# Altium PCB PCBenDIM.PcbDoc (part 3 of 3)
Units mil, origin at the board's own origin, x right, y up, seen from the top; angles counter-clockwise.
Board outline 3937.01 x 3149.61 mil, 2 copper layers (Top Layer, Bottom Layer); 105 components, 104 nets, 450 pads, 157 vias.
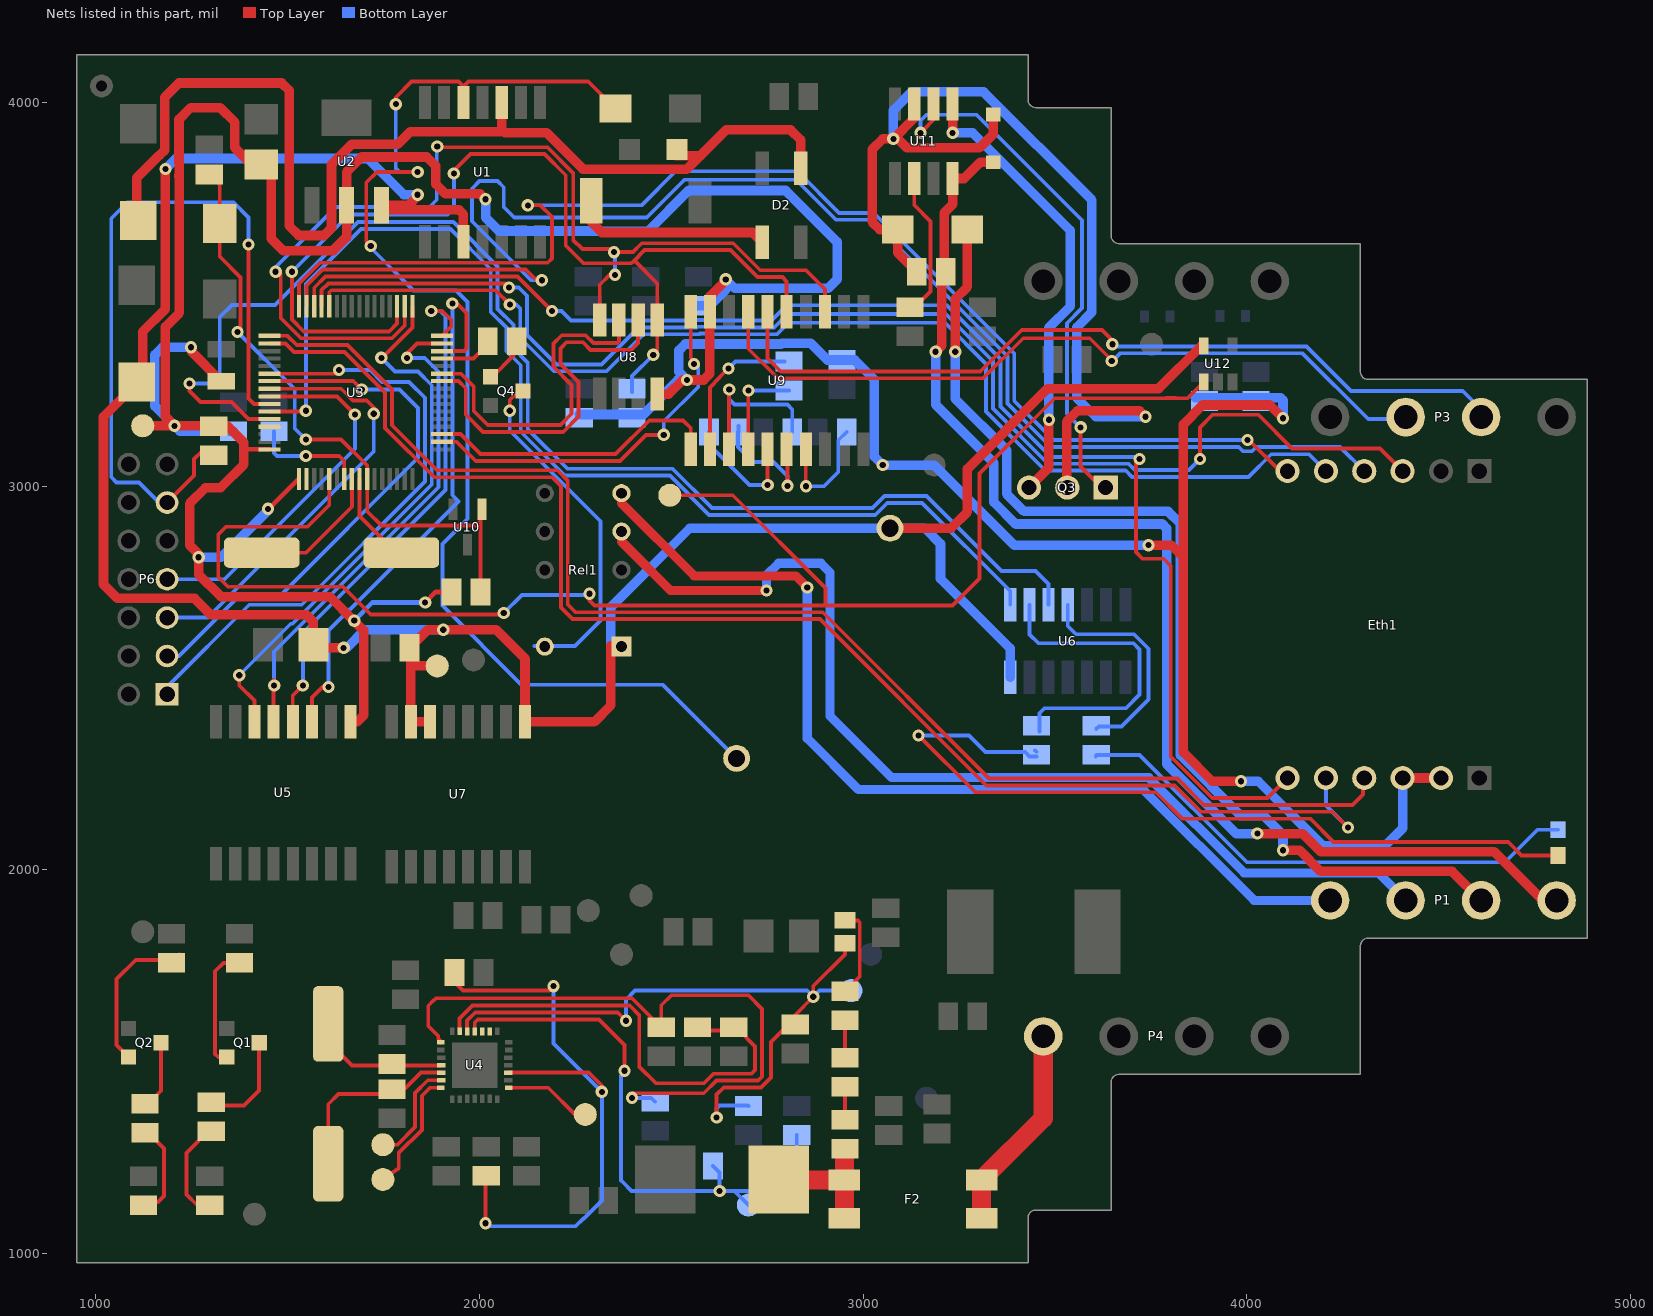
[diagram p2: the nets of this part, all layers, seen from the top]

## Via types
v1: diameter 32, hole 16, Top Layer to Bottom Layer, 157 vias

## Nets (pads, with @x,y where several pads share a name; then routed paths per layer and width w, separated by ;. In a path a pad name is that pad's centre, name@x,y a point inside that pad or via, vN(x,y) a via of type N, cw(c..) or ccw(c..) an arc to the next point about the centre after c; other vN are vias at no path point) (continued)
MICRO_RTS_1: P6.11 R1.2 U3.58 | length 1991.7
  Top Layer w10: P6.11@1185.43,2957.48 1255.91,3027.95 1255.91,3070.87 1273.62,3088.58 R1.2@1326.77,3088.58 ; v1(1397.64,3629.92) 1397.64,3228.5 1412.05,3214.09 U3.58@1452.17,3214.09
  Bottom Layer w10: P6.11@1185.43,2957.48 1164.57,2957.48 1112.05,3010 1054,3010 1040,3024 1040,3697.48 1082.68,3740.16 1358.27,3740.16 1397.64,3700.79 v1(1397.64,3629.92)
MICRO_TCK_1: P6.7 U3.57 | length 962.3
  Top Layer w10: U3.57@1452.17,3234.09 1628.11,3234.09 v1(1675,3187.2)
  Bottom Layer w10: P6.7@1185.43,2757.48 1334.88,2757.48 1675,3097.6 v1(1675,3187.2)
MICRO_TD0_1: P6.1 U3.54 | length 1576
  Top Layer w10: U3.54@1452.17,3293.09 1631.68,3293.09 1633.86,3295.28 v1(1633.86,3303.15)
  Bottom Layer w10: P6.1@1185.43,2457.48 1185.43,2476.77 1399.66,2691 1536.43,2691 1857.64,3012.21 1857.64,3230.68 1816.19,3272.13 1746,3272.13 1714.98,3303.15 v1(1633.86,3303.15)
MICRO_TDI_1: P6.3 U3.55 | length 1414.5
  Top Layer w10: U3.55@1452.17,3274.09 1670.79,3274.09 v1(1692.91,3251.97)
  Bottom Layer w10: P6.3@1185.43,2557.48 1216.62,2557.48 1368.01,2708.87 1474.32,2708.87 1839.76,3074.32 1839.76,3203.68 1791.48,3251.97 v1(1692.91,3251.97)
MICRO_TMS_1: P6.5 U3.56 | length 1139.6
  Top Layer w10: U3.56@1452.17,3254.09 1639.61,3254.09 1670.61,3223.09 1706.04,3223.09 1728.35,3200.79 1716.54,3188.98 v1(1724.41,3188.98)
  Bottom Layer w10: P6.5@1185.43,2657.48 1291.34,2657.48 1724.41,3090.55 v1(1724.41,3188.98)
NetC4_2: C4.2 U3.7 | length 294.4
  Top Layer w10: v1(1547.24,3078.74) 1547.56,3078.43 1634.17,3078.43 1647.17,3065.43 U3.7@1647.17,3019.09
  Bottom Layer w10: C4.2@1464.57,3143.31 1464.57,3086.61 1472.44,3078.74 v1(1547.24,3078.74)
NetC6_1: C6.1 C7.2 U4.15 | length 1720.9
  Top Layer w10: U4.15@1898.82,1550 1898.82,1553.94 1892.32,1560.43 1892.32,1566.52 1866.14,1592.7 1866.14,1645.67 1879.39,1658.92 1880.45,1658.92 1886.89,1665.35 2397.64,1665.35 C6.1@2473.62,1589.37 2473.62,1646.85 2500,1673.23 2700.79,1673.23 2736.38,1637.64 2736.38,1460.79 2726.22,1450.63 2617.64,1450.63 2584.6,1417.59 2397.91,1417.59 2389.76,1409.45 2393.7,1405.51 v1(2397.63,1405.51)
  Bottom Layer w10: v1(2397.63,1405.51) 2447.64,1405.51 C7.2@2457.87,1395.28
NetC8_1: C8.1 C9.2 U4.3 | length 1645.9
  Top Layer w10: C9.2@1934.65,1732.28 1934.65,1707.09 1956.69,1685.04 2181.1,1685.04 v1(2192.91,1696.85) ; v1(2015.75,1078.74) C8.1@2015.75,1202.36 ; U4.3@2075,1471.26 2284.64,1471.26 2318.9,1437.01 v1(2318.9,1421.26)
  Bottom Layer w10: v1(2015.75,1078.74) 2023.62,1070.87 2250.31,1070.87 2270.8,1091.36 2272.46,1091.36 2318.9,1137.8 v1(2318.9,1421.26) 2192.91,1547.24 2192.91,1692.91 2196.85,1696.85 v1(2192.91,1696.85)
NetC13_2: C13.2 U4.18 Y2.1 | length 376.8
  Top Layer w10: Y2.1@1615.83,1598.23 Y2.1@1605.51,1598.23 1605.51,1551.97 1667.32,1490.16 1899.01,1490.16 U4.18@1899.8,1490.95
NetC14_2: C14.2 U4.19 Y2.2 | length 483.3
  Top Layer w10: Y2.2@1605.51,1234.05 1605.51,1388.98 1631.89,1415.36 1791.34,1415.36 1847.25,1471.26 U4.19@1899.8,1471.26
NetC16_1: C16.1 C17.2 U4.13 | length 1239.1
  Top Layer w10: U4.13@1948.03,1579.53 1948.03,1612.76 1981.26,1645.98 2391.73,1645.98 2416.14,1621.57 2416.14,1487.24 2459.82,1443.56 2585.3,1443.56 2610.24,1468.5 2708.66,1468.5 2718.5,1478.35 2718.5,1539.76 2677.17,1581.1 2646.85,1581.1 C17.2@2552.36,1581.1
NetC21_2: C21.2 D6.2 D7.2 Q3.2 U11.7 | length 2779.4
  Top Layer w25: U11.7@3133.27,3996.21 3133.27,3960.04 v1(3078.74,3905.51) ; C21.2@3147.64,3551.18 3090.55,3608.27 D6.2@3090.55,3669.29 3043.31,3669.29 3023.62,3688.98 3023.62,3877.95 3051.18,3905.51 v1(3078.74,3905.51) ; D7.2@3339.37,3969.09 3339.37,3918.11 3303.15,3881.89 3114.17,3881.89 3090.55,3905.51 v1(3078.74,3905.51) ; Q3.2@3532.28,2996.46 3530.56,2998.18 3530.56,3168.61 3558.8,3196.85 3720.47,3196.85 v1(3736.22,3181.1)
  Bottom Layer w25: v1(3078.74,3905.51) 3078.74,3980.1 3126.57,4027.93 3314.14,4027.93 3596.34,3745.73 3596.34,3564.56 3595.96,3564.19 3595.96,3504.71 3596.34,3504.34 3596.34,3453.7 3556.87,3414.24 3556.87,3230.53 3606.3,3181.1 v1(3736.22,3181.1)
NetC28_1: C28.1 U9.2 | length 384.4
  Top Layer w10: U9.2@2600.59,3096.46 2600.59,3257.71 2625.96,3283.08 2625.96,3283.96 v1(2649,3307)
  Bottom Layer w10: v1(2649,3307) 2667.2,3325.2 C28.1@2795.28,3325.2
NetC28_2: C28.2 U9.4 | length 259.7
  Top Layer w10: U9.4@2700.59,3096.46 2700.59,3249.4 v1(2701,3249.81)
  Bottom Layer w10: v1(2701,3249.81) 2806.88,3249.81 C28.2@2807.09,3249.61
NetC30_1: C30.1 U9.5 | length 339
  Top Layer w10: v1@2750.59,2998.41 2751,2998.82 v1(2751,3003) 2751,3096.05 U9.5@2750.59,3096.46
  Bottom Layer w10: C30.1@2598.03,3141.73 2598.03,3108.97 2704,3003 v1(2751,3003) 2751,3002.15 v1@2743.85,2995
NetC30_2: C30.2 U9.6 | length 337.4
  Top Layer w10: U9.6@2800.59,3096.46 2802.56,3094.48 v1(2802.56,3001)
  Bottom Layer w10: C30.2@2673.62,3141.73 2673.62,3101.97 2712.59,3063 2766,3063 2802.56,3026.44 v1(2802.56,3001) ; C30.2@2675.2,3141.73 C30.2@2675.2,3157.48
NetC31_1: C31.1 U9.3 | length 414.8
  Top Layer w10: U9.3@2650.59,3096.46 2650.59,3251.59 v1(2651,3252)
  Bottom Layer w10: v1(2651,3252) 2651,3226.95 2664.84,3213.11 2802.64,3213.11 2815.36,3200.39 C31.1@2815.36,3141.73
NetC32_1: C32.1 U9.7 | length 309.6
  Top Layer w10: U9.7@2850.59,3096.46 2850.59,3000.41 v1(2851,3000)
  Bottom Layer w10: v1(2851,3000) 2897.64,3000 2935.04,3037.4 2935.04,3119.68 C32.1@2957.09,3141.73
NetD2_1: D2.1 F1.2 | length 499.6
  Top Layer w25: F1.2@2291.34,3720.47 2291.34,3688.98 2318.9,3661.42 2711.81,3661.42 D2.1@2737.4,3635.83
NetD4_1: D4.1 R15.1 | length 2131.8
  Top Layer w10: v1(3144.32,2350.39) 3292.58,2202.13 3762.87,2202.13 3831.62,2133.38 4165.52,2133.38 4226.54,2072.36 4681.58,2072.36 4716.54,2037.4 D4.1@4811.02,2037.4
  Bottom Layer w10: v1(3144.32,2350.39) 3275.59,2350.39 3318.9,2307.09 3422.44,2307.09 3433.66,2295.87 R15.1@3452.76,2295.87 ; R15.1@3448.42,2311.02 R15.1@3451.57,2307.87
NetD5_1: D5.1 R18.1 | length 1360.7
  Bottom Layer w10: R18.1@3606.3,2295.28 R18.1@3610.63,2299.61 ; R18.1@3607.48,2299.61 R18.1@3610.63,2299.61 ; D5.1@4811.02,2104.33 4757.87,2104.33 4673.23,2019.68 4000.71,2019.68 3720.79,2299.61 R18.1@3610.63,2299.61
NetD10_1: D10.1 R27.1 | length 272.2
  Top Layer w10: D10.1@1296.85,1125.59 1264.17,1125.59 1236.22,1153.54 1236.22,1262.2 R27.1@1300.79,1326.77
NetD11_1: D11.1 R28.1 | length 253.8
  Top Layer w10: D11.1@1123.62,1133.86 1161.42,1133.86 1177.17,1149.61 1177.17,1273.23 R28.1@1127.56,1322.83
NetEth1_3: Eth1.3 U3.45 | length 3480.5
  Top Layer w10: U3.45@1588.17,3469.09 1588.17,3511.08 1605.93,3528.84 2065.98,3528.84 v1(2076.82,3518) ; v1(3877.95,3070.87) 3877.95,3153.54 3910.76,3186.35 4030.18,3186.35 4118.11,3098.43 4347.24,3098.43 Eth1.3@4406.3,3039.37
  Bottom Layer w10: v1(2076.82,3518) 2102.39,3518 2123.86,3496.53 2123.86,3394.62 2200.89,3317.58 2317.58,3317.58 2414.13,3414.13 2565.72,3414.13 2567.3,3415.71 2603.23,3415.71 2604.81,3414.13 2768.31,3414.13 2803.18,3449 3215.32,3449 3338.58,3325.74 3338.58,3202.23 3482.11,3058.7 3691.8,3058.7 3708.51,3041.99 3849.08,3041.99 v1(3877.95,3070.87)
NetEth1_4: Eth1.4 U3.47 | length 3866.7
  Top Layer w10: U3.47@1549.17,3469.09 1549.17,3522.64 1591.12,3564.59 2057.3,3564.59 2057.46,3564.75 2096.18,3564.75 2096.34,3564.59 2120.45,3564.59 2148.24,3536.8 v1(2162.43,3536.8)
  Bottom Layer w10: v1(2162.43,3536.8) 2134.15,3536.8 1980.32,3690.63 1980.32,3775.59 2000,3795.28 2047.24,3795.28 2062.99,3779.53 2062.99,3728.35 2090.55,3700.79 2435.79,3700.79 2534,3799 2825.33,3799 2929.6,3694.72 3020.16,3694.72 3376.14,3338.74 3376.14,3215.23 3489.01,3102.36 3979.17,3102.36 3990.17,3091.36 4014.09,3091.36 4025.09,3102.36 4243.31,3102.36 Eth1.4@4306.3,3039.37
NetEth1_5: Eth1.5 U3.44 | length 3104.2
  Top Layer w10: U3.44@1608.17,3469.09 1608.17,3505.8 1613.33,3510.97 2042.03,3510.97 v1(2079,3474)
  Bottom Layer w10: v1(2079,3474) 2094.98,3474 2105.98,3463 2105.98,3387.22 2193.49,3299.71 2331.2,3299.71 2427.76,3396.26 2573.13,3396.26 2574.7,3397.83 2595.83,3397.83 2597.4,3396.26 2775.71,3396.26 2805.45,3426 3213.05,3426 3320.71,3318.34 3320.71,3194.83 3474.71,3040.83 3684.4,3040.83 3701.11,3024.12 4004.43,3024.12 4063.86,3083.54 4162.12,3083.54 Eth1.5@4206.3,3039.37
NetEth1_6: Eth1.6 U3.48 | length 3342.7
  Top Layer w10: U3.48@1529.68,3469.61 U3.48@1529.17,3469.09 1529.17,3527.91 1583.72,3582.46 2049.89,3582.46 2050.05,3582.62 2103.59,3582.62 2177.75,3582.6 2188.98,3593.83 2188.98,3702.38 2159.08,3732.28 v1(2125.98,3732.28) ; v1@4003.94,3122.05 4086.61,3039.37 Eth1.6@4106.3,3039.37
  Bottom Layer w10: v1(2125.98,3732.28) 2422.28,3732.28 2511,3821 2828.61,3821 2937.01,3712.6 3027.56,3712.6 3394.02,3346.14 3394.02,3222.63 3496.41,3120.24 v1(4002.13,3120.24)
NetEth1_10: Eth1.10 U3.49 | length 3632.2
  Top Layer w10: U3.49@1476.38,3392.09 1499.33,3392.09 1523.47,3367.95 1655.77,3367.95 1771.65,3252.07 1771.65,3159.14 1889.29,3041.5 2202.6,3041.5 2230.16,3013.94 2230.16,2691.1 2249.84,2671.42 2894.68,2671.42 3328.23,2237.87 3819.13,2237.87 3887.87,2169.13 4275.43,2169.13 4303.15,2196.85 4303.15,2236.22 Eth1.10@4306.3,2239.37
NetEth1_11: Eth1.11 U3.50 | length 3727.1
  Top Layer w10: U3.50@1452.17,3372.09 1494.05,3372.09 1516.06,3350.08 1648.37,3350.08 1753.78,3244.66 1753.78,3151.73 1881.89,3023.62 2188.98,3023.62 2212.28,3000.31 2212.28,2683.7 2242.44,2653.54 2887.28,2653.54 3320.82,2220 3811.72,2220 3880.47,2151.25 4222.76,2151.25 v1(4263.78,2110.24)
  Bottom Layer w10: Eth1.11@4206.3,2239.37 4206.3,2167.72 v1(4263.78,2110.24)
NetEth1_12: Eth1.12 U3.46 | length 3721.7
  Top Layer w10: U3.46@1569.17,3469.09 1569.17,3517.36 1598.52,3546.72 2064.7,3546.72 2064.86,3546.87 2088.78,3546.87 2088.94,3546.72 2098.95,3546.72 v1(2188.98,3456.69) ; v1@3711.28,3060.37 3711.28,2828.09 3728.35,2811.02 3783.46,2811.02 3802,2792.49 3802,2295 3910,2187 4053.93,2187 Eth1.12@4106.3,2239.37
  Bottom Layer w10: v1(2188.98,3456.69) 2214.08,3456.69 2238.76,3432.01 2558.32,3432.01 2559.89,3433.58 2610.63,3433.58 2612.21,3432.01 2760.91,3432.01 2800.9,3472 3217.6,3472 3358.27,3331.33 3358.27,3207.82 3489.52,3076.57 3714.76,3076.57 v1(3720.47,3070.87)
NetF2_1: F2.1 P4.4 | length 540.8
  Top Layer w50: F2.1@3308.66,1091.73 F2.1@3308.66,1191.73 3469.49,1352.56 P4.4@3469.49,1565.94
NetF2_2: F2.2 R4.1 V1.1 | length 354.3
  Top Layer w10: V1.1@2779.53,1192.91 V1.1@2780.71,1191.73
  Top Layer w50: V1.1@2780.71,1191.73 F2.2@2951.18,1191.73 ; F2.2@2951.18,1091.73 F2.2@2951.18,1191.73 ; R4.1@2952.76,1273.23 2951.18,1271.65 F2.2@2951.18,1191.73
NetP1_3: P1.3 Rel1.4 | length 2758.7
  Top Layer w23.62: Rel1.4@2370.08,2881.89 2370.08,2855.91 2497.64,2728.34 v1(2748.03,2728.34)
  Bottom Layer w23.62: v1(2748.03,2728.34) 2748.03,2767.71 2779.53,2799.21 2889.76,2799.21 2913.39,2775.59 2913.39,2401.57 3074.53,2240.43 3745.05,2240.43 3993.36,1992.13 4342.52,1992.13 P1.3@4414.37,1920.28
NetP1_4: P1.4 Rel1.5 | length 2533
  Top Layer w23.62: Rel1.5@2370.08,2981.89 2370.08,2955.91 2559.77,2766.22 2824.34,2766.22 v1(2854.33,2736.22)
  Bottom Layer w23.62: v1(2854.33,2736.22) 2854.33,2342.52 2987.91,2208.94 3730.7,2208.94 4019.36,1920.28 P1.4@4217.52,1920.28
NetQ1_1: Q1.1 R27.2 | length 265
  Top Layer w10: R27.2@1300.79,1385.83 1385.83,1385.83 1425.2,1425.2 1425.2,1548.62 Q1.1@1425.79,1549.21
NetQ1_2: Q1.2 R25.1 | length 322.1
  Top Layer w10: Q1.2@1341.14,1511.81 1318.9,1511.81 1310.55,1520.16 1310.55,1735.75 1332.28,1757.48 R25.1@1374.02,1757.48
NetQ2_1: Q2.1 R28.2 | length 184.9
  Top Layer w10: R28.2@1127.56,1381.89 1169.88,1424.21 Q2.1@1169.88,1549.21
NetQ2_2: Q2.2 R26.1 | length 412.1
  Top Layer w10: Q2.2@1085.24,1511.81 1053.74,1543.31 1053.74,1715.16 1103.94,1765.35 R26.1@1203.94,1765.35 ; R26.1@1208.66,1765.35 R26.1@1203.94,1765.35 ; R26.1@1218.11,1779.53 R26.1@1203.94,1765.35
NetQ3_1: Q3.1 U11.6 | length 1443.4
  Top Layer w10: v1(3149.61,3921.26) 3188.98,3960.63 3183.27,3960.63 U11.6@3183.27,3996.21 ; v1@3566.75,3153.54 3566.75,3051.36 3621.65,2996.46 Q3.1@3632.28,2996.46 ; v1(3566.93,3153.54) v1@3566.93,3165.01
  Bottom Layer w10: v1(3149.61,3921.26) 3149.61,3952.76 3165.35,3968.5 3295.9,3968.5 3570.96,3693.44 3570.96,3575.07 3570.59,3574.7 3570.59,3494.2 3570.96,3493.82 3570.96,3464.21 3531.5,3424.75 3531.5,3188.98 v1(3566.93,3153.54)
NetQ3_3: Q3.3 U11.5 | length 1202
  Top Layer w25: v1(3233.27,3921.26) U11.5@3233.27,3996.21 ; Q3.3@3432.28,2996.46 3484.25,3048.42 v1(3484.25,3173.23)
  Bottom Layer w25: v1(3233.27,3921.26) 3285.67,3921.26 3539.86,3667.07 3539.86,3469 3484.25,3413.39 v1(3484.25,3173.23)
NetQ4_1: Q4.1 Rel1.12 | length 895.4
  Top Layer w10: v1(2078.74,3196.85) 2078.74,3224.41 Q4.1@2094.49,3240.16
  Bottom Layer w10: v1(2078.74,3196.85) 2078.74,3145.67 2315.69,2908.72 2315.69,2650.33 2248.82,2583.46 2142.52,2583.46
NetQ4_3: Q4.3 R22.2 | length 120.3
  Top Layer w10: Q4.3@2028.54,3285.43 2033.46,3285.43 2088.58,3340.55 R22.2@2088.58,3377.95
NetR3_2: R3.2 U3.35 U8.1 U9.15 | length 2686.5
  Top Layer w10: v1(1510.79,3559.06) 1510.79,3434.76 1541.85,3403.7 1764.64,3403.7 1785.17,3424.23 U3.35@1785.17,3469.09 ; v1(1933.07,3814.96) 1933.07,3822.83 1976.06,3865.83 2169.61,3865.83 2224.72,3810.71 2224.72,3627.61 2270.97,3581.36 2395.01,3581.36 2396.32,3582.68 ; 2397.64,3582.68 2400.94,3585.98 ; v1(2452.76,3342.52) 2463.39,3353.15 U8.1@2463.39,3433.07 2463.39,3528.74 2406.14,3585.98 2400.94,3585.98 ; U9.15@2800.59,3454.72 2800.59,3534.06 2789.53,3545.12 2724.42,3545.12 2654.05,3615.49 2430.45,3615.49 2400.94,3585.98
  Bottom Layer w10: v1(1510.79,3559.06) 1660.4,3708.66 1917.32,3708.66 1933.07,3724.41 v1(1933.07,3814.96) ; R3.2@2397.64,3246.06 2397.64,3287.4 v1(2452.76,3342.52)
NetR4_2: R4.2 R9.1 | length 85.8
  Top Layer w10: R4.2@2952.76,1348.82 R9.1@2952.76,1434.65
NetR9_2: R9.2 R14.1 | length 97.6
  Top Layer w10: R9.2@2952.76,1510.24 R14.1@2952.76,1607.87
NetR14_2: R14.2 R23.1 | length 236.1
  Top Layer w10: R14.2@2952.76,1683.46 2991.22,1721.93 2991.22,1863.11 2986.22,1868.11 R23.1@2952.76,1868.11
NetR15_2: R15.2 U6.2 | length 826.8
  Bottom Layer w10: U6.2@3433.46,2690.94 3433.46,2613.78 3456.69,2590.55 3704.72,2590.55 3720.47,2574.8 3720.47,2456.69 3685.04,2421.26 3472.44,2421.26 3459.45,2408.27 R15.2@3459.45,2361.02
NetR18_2: R18.2 U6.4 | length 591
  Bottom Layer w10: U6.4@3533.46,2690.94 3533.46,2635.83 3555.12,2614.17 3706.38,2614.17 3744.09,2576.46 3744.09,2444.49 3673.62,2374.02 3614.57,2374.02 R18.2@3607.48,2366.93
NetR21_1: R21.1 U11.2 | length 363.8
  Top Layer w10: U11.2@3133.27,3802.21 3133.27,3732.87 3175.87,3690.28 3175.87,3507.87 3149.61,3481.61 R21.1@3149.61,3466.93
NetR22_1: R22.1 U3.29 | length 145.9
  Top Layer w10: U3.29@1902.17,3333.09 1984.67,3333.09 R22.1@2029.53,3377.95
NetU3_2: U3.2
NetU3_8: U3.8 Y1.2 | length 333.5
  Top Layer w10: Y1.2@1455.71,2826.77 1547.24,2826.77 1667.17,2946.69 U3.8@1667.17,3019.09
NetU3_9: U3.9 Y1.1 | length 268.8
  Top Layer w10: U3.9@1687.17,3019.09 1687.17,2922.76 1783.15,2826.77 Y1.1@1796.26,2826.77 Y1.1@1819.88,2826.77
NetU3_18: U3.18 U9.20 | length 1007.5
  Top Layer w10: U3.18@1902.17,3116.09 1940,3116.09 1989.97,3066.13 2365.97,3066.13 2433.7,3133.86 v1(2480.32,3133.86) ; U9.20@2550.59,3454.72 2550.59,3334.41 2566.1,3318.9 v1(2559.06,3318.9)
  Bottom Layer w10: v1(2480.32,3133.86) 2480.32,3169.32 2570,3259 2570,3315.82 2566.92,3318.9 v1(2559.06,3318.9)
NetU3_19: U3.19 U9.1 | length 769.7
  Top Layer w10: U3.19@1902.17,3136.09 1950.66,3136.09 2002.75,3084 2354.71,3084 2442.44,3171.73 2530.27,3171.73 2550.59,3151.41 U9.1@2550.59,3096.46
NetU3_26: U3.26 U8.2 | length 949.5
  Top Layer w10: U3.26@1902.17,3274.09 1945.36,3274.09 1964,3255.45 1964,3187 2009.27,3141.73 2218.09,3141.73 2258.03,3181.67 2258.03,3271.65 2210.79,3318.9 2210.79,3359.04 2227.08,3375.33 2269.4,3375.33 2289.65,3355.08 2395.46,3355.08 2413.39,3373 U8.2@2413.39,3433.07
NetU3_27: U3.27 U8.3 | length 890.7
  Top Layer w10: U3.27@1902.17,3293.09 1951.64,3293.09 1985,3259.73 1985,3196 2021.39,3159.61 2210.69,3159.61 2240.16,3189.08 2240.16,3264.25 2192.91,3311.49 2192.91,3372.36 2214.25,3393.7 2276.31,3393.7 2297.06,3372.95 2358.34,3372.95 2363.39,3378 U8.3@2363.39,3433.07
NetU3_30: U3.30 U5.3 | length 1471.6
  Top Layer w10: U5.3@1563.19,2385.79 1563.19,2449.02 1590.55,2476.38 v1(1606.3,2476.38) ; U3.30@1902.17,3352.09 1959.09,3352.09 1966,3359 1966,3451.31 1940.93,3476.38 v1(1929.13,3476.38)
  Bottom Layer w10: v1(1606.3,2476.38) 1606.3,2623.51 1661.27,2678.48 1662.73,2678.48 1944.88,2960.63 1929.13,2976.37 v1(1929.13,3476.38)
NetU3_31: U3.31 U5.5 | length 1330.6
  Top Layer w10: U5.5@1463.19,2385.79 1463.19,2494.69 1464.57,2493.31 v1(1464.57,2480.32) ; v1(1811.02,3334.65) 1811.02,3346.46 1836.66,3372.09 U3.31@1902.17,3372.09
  Bottom Layer w10: v1(1464.57,2480.32) 1464.57,2568.58 1893.39,2997.4 1893.39,3298.61 1857.35,3334.65 v1(1811.02,3334.65)
NetU3_32: U3.32 U5.4 | length 1378.4
  Top Layer w10: U5.4@1513.19,2385.79 1513.19,2454.13 v1(1539.37,2480.31) ; v1(1874.01,3456.69) 1902.68,3456.69 1926.3,3433.07 1926.3,3416.22 U3.32@1902.17,3392.09
  Bottom Layer w10: v1(1539.37,2480.31) 1539.37,2618.11 1911.26,2990 1911.26,3443.66 1898.23,3456.69 v1(1874.01,3456.69)
NetU3_33: U3.33 U5.6 | length 1434.4
  Top Layer w10: v1(1373.67,2507.18) 1373.67,2480.66 1413.19,2441.14 U5.6@1413.19,2385.79 ; v1(1744.09,3334.65) 1746.14,3334.65 1825.17,3413.67 U3.33@1825.17,3469.09
  Bottom Layer w10: v1(1373.67,2507.18) 1507.81,2641.33 1512.04,2641.33 1875.51,3004.81 1875.51,3263.28 1839.58,3299.21 1779.53,3299.21 v1(1744.09,3334.65)
NetU3_34: U3.34 U8.4 U9.13 | length 2734.1
  Top Layer w10: v1(1468.5,3559.05) 1468.5,3566.93 1481.92,3553.52 1481.92,3438.36 1534.45,3385.83 1772.04,3385.83 1805.17,3418.95 U3.34@1805.17,3469.09 ; v1(1889.76,3885.83) 1891.89,3883.7 2177.01,3883.7 2244.09,3816.62 2244.09,3642.08 2268,3618.17 v1@2343.17,3618.17 ; U8.4@2313.39,3433.07 2313.39,3525.28 2339.1,3551 v1(2353,3551) ; v1(2350.39,3610.24) 2399.92,3610.24 2423.05,3633.36 2661.45,3633.36 2731.82,3562.99 2851.01,3562.99 2900.59,3513.41 U9.13@2900.59,3454.72
  Bottom Layer w10: v1(1468.5,3559.05) 1468.5,3570.86 1625.98,3728.35 1870.08,3728.35 1888.45,3746.72 1888.45,3884.51 v1(1889.76,3885.83) ; v1(2350.39,3610.24) 2353,3610.24 v1(2353,3551)
NetU3_59: U3.59 U6.1 | length 2987
  Top Layer w10: U3.59@1452.17,3195.09 1541.11,3195.09 1547.24,3188.96 v1(1547.24,3196.85)
  Bottom Layer w10: v1(1547.24,3196.85) 1547.24,3527.45 1690.62,3670.84 1924.28,3670.84 2029.37,3565.74 2029.37,3454.46 2070.24,3413.6 2070.24,3352.65 2107.61,3315.27 2107.61,3142.07 2222.13,3027.56 2496.06,3027.56 2598.43,2925.2 3031.5,2925.2 3062.99,2956.69 3153.54,2956.69 3383.46,2726.77 U6.1@3383.46,2690.94
NetU3_60: U3.60 U6.3 | length 3430.4
  Top Layer w10: v1(1244.09,3267.72) 1244.09,3248.03 1272.49,3219.64 1353.09,3219.64 1397.64,3175.09 U3.60@1452.17,3175.09
  Bottom Layer w10: v1(1244.09,3267.72) 1295.28,3267.72 1322.83,3295.28 1322.83,3440.94 1354.33,3472.44 1466.95,3472.44 1683.22,3688.71 1931.68,3688.71 2047.24,3573.15 2047.24,3461.87 2088.11,3421 2088.11,3360.06 2125.49,3322.68 2125.49,3149.48 2229.53,3045.43 2503.47,3045.43 2605.83,2943.07 3024.09,2943.07 3055.59,2974.57 3165.43,2974.57 3361,2779 3449.35,2779 3483.46,2744.88 U6.3@3483.46,2690.94
NetU3_61: U3.61
NetU4_9: U4.9
NetU4_10: U4.10
OUTLM1: D1.2 L1.2 U1.12 | length 3293.1
  Top Layer w10: v1(1716.54,3625.98) 1704.72,3637.8 1704.72,3791.34 1732.28,3818.9 v1(1838.58,3818.9) ; v1(1781.79,3996.06) 1781.79,4014.08 1822.83,4055.12 1944.88,4055.12 1957.87,4042.13 1970.94,4055.2 2283.39,4055.2 D1.2@2354.33,3984.25 ; U1.12@1957.87,4000.59 U1.12@1957.87,4032.76
  Bottom Layer w10: v1(1716.54,3625.98) 1716.54,3621.73 1827.96,3510.31 1938.51,3510.31 1968.5,3480.32 1968.5,2915.21 1903.07,2849.77 1903.07,2689.04 2109.82,2482.28 2478.35,2482.28 L1.2@2670.08,2290.55 ; v1(1781.79,3996.06) 1781.79,3828.23 1791.13,3818.9 v1(1838.58,3818.9) v1@1842.52,3818.9
REF: C37.2 C38.2 R19.1 U3.10 U10.1 | length 1634.6
  Top Layer w10: C38.2@1295.28,3812.6 1322.83,3785.04 C37.2@1322.83,3685.04 1322.83,3598.43 1377.05,3544.21 1377.05,3410.5 v1(1368.76,3402.22) ; v1(1547.24,3122.04) 1639.12,3122.04 1707.17,3054 U3.10@1707.17,3019.09 1707.17,2934.57 1744.09,2897.64 1992.13,2897.64 2002.36,2907.87 ; R19.1@2002.36,2724.41 2002.36,2907.87 ; U10.1@2005.91,2933.07 2002.36,2929.53 2002.36,2907.87
  Bottom Layer w10: v1(1368.76,3402.22) 1369.43,3402.22 1518.37,3253.28 1518.37,3150.91 v1(1547.24,3122.04)
REVP_ADE: pad.000@1748.03,1283.46 U4.20 | length 273.6
  Top Layer w10: pad.000@1748.03,1283.46 1785.92,1283.46 1831.77,1329.31 1831.77,1418.39 1864.96,1451.58 U4.20@1899.8,1451.58
"RS232 RECIEVE DATA": P3.3 U9.16 | length 2191.4
  Top Layer w10: U9.16@2750.59,3454.72 2750.59,3333.74 2785.12,3299.21 3305.43,3299.21 3413.54,3407.32 3622.88,3407.32 3651.42,3378.78 3649.6,3376.96 v1(3649.6,3370.07)
  Bottom Layer w10: v1(3649.6,3370.07) 3657.49,3370.07 3663.23,3364.33 4155.35,3364.33 4271.65,3248.03 4562.99,3248.03 4611.22,3199.8 P3.3@4611.22,3180.12 P3.3@4611.22,3142.72
"RS232 TRANSMIT DATA": P3.2 U9.17 | length 1978.9
  Top Layer w10: U9.17@2700.59,3454.72 2700.59,3358.46 2777.72,3281.34 3312.83,3281.34 3417.32,3385.83 3590.62,3385.83 3647.96,3328.49 v1(3647.96,3326.67)
  Bottom Layer w10: v1@3657.48,3334.65 3669.29,3346.46 4145.67,3346.46 4316.62,3175.5 4409.75,3175.5 P3.2@4414.37,3180.12
SAL3: D6.1 P1.2 | length 2811
  Top Layer w25: v1(3240.16,3350.39) 3240.16,3488.19 3271.65,3519.69 D6.1@3271.65,3669.29 ; v1(4094.49,2051.18) 4137.48,2051.18 4192.6,1996.06 4535.43,1996.06 P1.2@4611.22,1920.28
  Bottom Layer w25: v1(3240.16,3350.39) 3240.16,3227.82 3374.02,3093.96 3374.02,2980.31 3373.85,2980.15 3419.63,2934.37 3795.09,2934.37 3826.77,2902.7 3826.77,2298.67 3983.7,2141.73 4043.31,2141.73 4094.49,2090.55 v1(4094.49,2051.18)
SAL4: C21.1 D7.1 P1.1 U11.4 | length 3295.9
  Top Layer w25: v1(3188.98,3350.39) 3203.78,3365.2 3203.78,3365.46 3204.72,3366.4 C21.1@3204.72,3554.92 ; C21.1@3211.91,3562.11 3211.91,3713.33 3233.27,3734.69 U11.4@3233.27,3802.21 3262.84,3802.21 3305.71,3845.08 D7.1@3339.37,3845.08 ; v1(4027.56,2094.49) 4145.61,2094.49 4193.11,2046.99 4645.3,2046.99 4772.01,1920.28 P1.1@4808.07,1920.28
  Bottom Layer w25: v1(3188.98,3350.39) 3188.98,3212.6 3340.98,3060.6 3340.98,2958.24 3397.71,2901.5 3779.85,2901.5 3791.34,2890.01 3791.34,2275.59 3972.44,2094.49 v1(4027.56,2094.49)
SALIDADAC: pad.000@2496.06,2976.38 U3.5 U12.1 | length 4127.4
  Top Layer w10: U3.5@1608.17,3019.09 1608.17,2950.84 1551.53,2894.21 1339.09,2894.21 1318.9,2874.02 1318.9,2763.78 1344.65,2738.03 1643.86,2738.03 1716.54,2665.35 2059.06,2665.35 v1(2062.99,2669.29) ; v1(2286.81,2719.88) 2286.81,2702.05 2299.57,2689.29 2902.09,2689.29 ; pad.000@2496.06,2976.38 2660.22,2976.38 2902.09,2734.51 2902.09,2689.29 ; 2921.26,2689.29 2902.09,2689.29 ; U12.1@3887.8,3271.65 3845.32,3229.18 3815.6,3229.18 3815.11,3229.66 3791.19,3229.66 3790.7,3229.18 3499.36,3229.18 3303.15,3032.96 3303.15,2759.84 3232.6,2689.29 2921.57,2689.29 2921.26,2688.98 2902.4,2688.98 2902.09,2689.29
  Bottom Layer w10: v1(2062.99,2669.29) 2110.24,2716.54 2283.46,2716.54 v1(2286.81,2719.88)
V3V3: C3.2 C5.2 C23.2 C29.1 C33.1 C34.1 C36.2 Eth1.8 Eth1.9 pad.000@1122.05,3157.48 R1.1 R3.1 R10.1 R19.2 U2.2 U3.1 U3.64 U5.1 U8.8 U9.19 | length 11398.9
  Top Layer w12: 1385.83,3096.09 U3.64@1452.17,3096.09 ; v1@1451.02,2940.94 U3.1@1529.17,3019.09 ; v1@1673.23,2648.31 v1(1673.23,2649.61) ; v1(1858.27,2696.85) 1885.83,2724.41 R19.2@1926.77,2724.41
  Top Layer w25: pad.000@1122.05,3157.48 v1(1204.93,3157.48) ; v1(1248.03,3362.2) 1248.03,3351.97 C36.2@1326.77,3273.23 ; U5.1@1663.19,2385.79 1681.06,2385.79 1697.74,2402.46 1697.74,2623.8 1673.23,2648.31 1609.48,2712.06 1325.5,2712.06 1267.72,2769.84 v1(1267.72,2814.96) 1267.72,2822.83 1244.09,2846.46 1244.09,2954.77 1285.39,2996.06 1324.8,2996.06 1385.83,3057.09 1385.83,3096.09 1385.83,3114.17 1342.52,3157.48 v1(1204.93,3157.48) ; v1(2015.75,3748.03) 2001.5,3762.28 1910.94,3762.28 1885.83,3787.4 1885.83,3834.89 1862.45,3858.27 1692.91,3858.27 1685.04,3850.39 1653.55,3818.9 U2.2@1653.55,3732.28 1653.55,3649.61 1618.11,3614.17 1488.19,3614.17 1456.69,3645.67 1456.69,3812.83 C3.2@1430.94,3838.58 1405.51,3838.58 1362.2,3881.89 1362.2,3948.82 1323.9,3987.13 1247.24,3987.13 1216.54,3956.42 1216.54,3842.78 1217.48,3841.84 1217.48,3811.71 1216.54,3810.76 1216.54,3807.35 1217.48,3806.41 1217.48,3451.83 1181.1,3415.46 1181.1,3343.61 1180.85,3343.35 1180.85,3263.58 1181.2,3263.23 1181.2,3231.29 1181.1,3231.19 1181.1,3181.31 v1(1204.93,3157.48) ; U8.8@2463.39,3240.16 2493,3240.16 v1@2529.84,3277 ; v1(2541,3277) 2584,3277 2600.59,3293.59 U9.19@2600.59,3454.72 2600.59,3494.59 2625.98,3519.98 2641.73,3535.74 v1(2641.73,3539.37) ; v1(3744.09,2846.46) 3803.15,2846.46 3834.65,2814.96 ; v1(3985,2231) 3910.11,2231 3834.65,2306.46 3834.65,2814.96 ; v1(4094.49,3177.17) 4059.93,3211.73 3884.96,3211.73 3834.65,3161.42 3834.65,2814.96 ; Eth1.9@4406.3,2247.25 Eth1.9@4406.3,2239.37 Eth1.8@4506.3,2239.37
  Bottom Layer w12: v1(1673.23,2649.61) 1720.47,2696.85 v1(1858.27,2696.85)
  Bottom Layer w25: v1(1248.03,3362.2) 1173.23,3362.2 1153.54,3342.52 1153.54,3208.86 v1(1204.93,3157.48) 1219.1,3143.31 C5.2@1358.27,3143.31 ; v1(1267.72,2814.96) 1326.77,2814.96 v1@1448.82,2937.01 ; v1(2015.75,3748.03) 2015.75,3700.25 2050.65,3665.35 2282.35,3665.35 2283.22,3664.48 2438.48,3664.48 2545,3771 2798,3771 2932.2,3636.8 2932.2,3539.2 2908.75,3515.75 2665.35,3515.75 v1(2641.73,3539.37) 2641.73,3511.81 2600,3470.08 R10.1@2570.87,3470.08 ; C23.2@2259.84,3187.01 2427.17,3187.01 2517.16,3277 v1(2541,3277) 2519.68,3298.32 2519.68,3354.33 2536.24,3370.89 2583.64,3370.89 ; 2586.89,3370.89 2786.22,3370.89 2787.85,3372.51 2863.71,3372.51 2907.09,3329.13 C29.1@2944.88,3329.13 2977.87,3329.13 3029,3278 3029,3077.3 v1(3051.18,3055.12) 3185.04,3055.12 3308.1,2932.06 ; 3309.69,2930.46 3393.7,2846.46 v1(3744.09,2846.46) ; C33.1@3866.28,3230.32 4000.14,3230.32 4088.58,3230.31 4094.49,3224.41 v1(4094.49,3177.17) ; v1(3985,2231) 4030,2231 4198,2063 4361,2063 4406.3,2108.3 Eth1.9@4406.3,2239.37
  other v1: 1448.82,2940.94
V5: C2.2 C24.2 C25.1 L1.1 pad.000@1889.76,2531.5 Rel1.1 U1.3 U2.3 U6.14 U7.1 U7.6 U7.7 U12.5 | length 7133
  Top Layer w25: v1(1181.1,3826.77) 1181.1,3461.95 1122.05,3402.89 1122.05,3283.47 1019.68,3181.1 1019.68,2744.09 1056.2,2707.58 1256.99,2707.58 1299.21,2665.35 1547.24,2665.35 1566.93,2645.67 C25.1@1566.93,2586.61 1574.8,2578.74 v1(1645.67,2578.74) ; v1(1838.58,3759.84) 1838.58,3755.91 1814.96,3732.28 U2.3@1744.1,3732.28 1744.1,3721.9 1745.53,3720.47 1946.47,3720.47 1957.87,3709.07 U1.3@1957.87,3637.2 ; U7.6@1870.47,2385.83 U7.7@1820.87,2385.83 C24.2@1820.87,2566.93 ; pad.000@1889.76,2531.5 1825.79,2531.5 C24.2@1825.79,2571.85 ; 2342.52,2583.46 2342.52,2429.13 2299.21,2385.83 U7.1@2118.5,2385.83 2118.5,2550.79 2043.31,2625.98 v1(1905.51,2625.98) 1866.14,2625.98 1825.79,2585.63 C24.2@1825.79,2578.74 ; L1.1@3070.08,2890.55 3229.13,2890.55 3271.65,2933.07 3271.65,3045.41 3480.79,3254.55 3770.3,3254.55 3881.89,3366.14 U12.5@3887.8,3366.14 ; C24.2@1820.87,2566.93 C24.2@1825.79,2571.85 ; C24.2@1820.87,2566.93 1809.05,2578.74 C24.2@1825.79,2578.74 ; C24.2@1825.79,2571.85 C24.2@1825.79,2578.74
  Bottom Layer w25: v1(1181.1,3826.77) 1208.66,3854.33 1708.66,3854.33 1803.15,3759.84 v1(1838.58,3759.84) ; v1(1645.67,2578.74) 1653.8,2578.74 1701.04,2625.98 v1(1905.51,2625.98) ; 2342.52,2583.46 2342.52,2685.04 2548.03,2890.55 L1.1@3070.08,2890.55 3160.89,2890.55 3201.73,2849.71 3201.73,2758.9 3383.46,2577.17 U6.14@3383.46,2501.97
VCCIN: C1.2 D2.3 D3.2 U1.10 | length 2905.4
  Top Layer w25: C1.2@1125.99,3708.66 1106.3,3728.35 1106.3,3803.41 1166.04,3863.15 1166.3,3863.15 1179.72,3876.57 1179.72,4014.37 1216.54,4051.18 1484.25,4051.18 1503.94,4031.5 1503.94,3678.82 1529.21,3653.54 1594.49,3653.54 1614.17,3673.23 1614.17,3838.58 1666.73,3891.14 1786.36,3891.14 1818.92,3923.7 2052.44,3923.7 2057.87,3929.13 ; U1.10@2057.87,4000.59 2057.87,3929.13 ; D3.2@2511.58,3861.38 2575.27,3861.38 ; 2576.1,3861.38 2575.27,3861.38 ; D2.3@2837.4,3828.74 2837.4,3902.76 2811.02,3929.13 2643.03,3929.13 2575.27,3861.38 ; 2057.87,3929.13 2065.75,3921.26 2175.34,3921.26 2269.82,3826.77 2540.67,3826.77 2575.27,3861.38
VN_ADE: C18.1 pad.000@2700.79,1125.98 R6.1 U4.11 | length 1504.7
  Top Layer w10: U4.11@1987.4,1578.55 1987.4,1601.57 1996.06,1610.24 2311.02,1610.24 2377.95,1543.31 v1(2377.95,1476.38) ; v1@2623.4,1165.35 v1(2625.98,1162.77)
  Bottom Layer w10: v1(2377.95,1476.38) 2377.95,1471.58 2368.76,1462.38 2368.76,1190.3 2373.52,1185.53 2396.28,1162.77 v1(2625.98,1162.77) ; C18.1@2608.66,1228.35 2625.98,1211.02 v1(2625.98,1162.77) ; pad.000@2700.79,1125.98 2664,1162.77 ; R6.1@2826.77,1308.66 2826.77,1232.28 2757.26,1162.77 2664,1162.77 ; v1(2625.98,1162.77) 2664,1162.77
VP_ADE: C15.2 pad.000@2968.5,1685.04 R5.2 R23.2 U4.12 | length 1866.3
  Top Layer w10: U4.12@1967.72,1578.55 1967.72,1607.17 1988.66,1628.11 2360.31,1628.11 v1(2381.89,1606.53) ; v1(2618.11,1354.33) 2618.11,1414.37 2636.49,1432.76 2733.62,1432.76 2759.84,1458.97 2759.84,1551.18 C15.2@2797.24,1588.58 ; C15.2@2822.83,1596.85 2822.83,1622.05 v1(2870.08,1669.29) 2870.08,1696.85 2952.76,1779.53 R23.2@2952.76,1809.06
  Bottom Layer w10: v1(2381.89,1606.53) 2381.89,1661.42 2405.51,1685.04 2854.33,1685.04 v1(2870.08,1669.29) 2885.83,1685.04 pad.000@2968.5,1685.04 ; v1(2618.11,1354.33) 2618.11,1377.95 2625.98,1385.83 2699.21,1385.83 R5.2@2700.79,1384.25
ZX_1_ADE: pad.000@1748.03,1192.91 U4.21 | length 322.1
  Top Layer w10: pad.000@1748.03,1192.91 1789.21,1222.28 1789.21,1261.48 1849.65,1321.91 1849.65,1410.98 1870.56,1431.89 U4.21@1898.82,1431.89
ZX_ADE: pad.000@2275.59,1362.2 U4.1 | length 228.5
  Top Layer w10: U4.1@2075.98,1431.89 2179.11,1431.89 2248.8,1362.2 pad.000@2275.59,1362.2
pads on no net: P6.2 P6.4 P6.6 P6.8 P6.10 P6.13 Rel1.3 Rel1.8 Rel1.9 Rel1.10 U1.1 U1.2 U1.7 U1.8 U1.9 U1.11 U1.13 U1.14 U2.4 U3.3 U3.4 U3.6 U3.12 U3.14 U3.15 U3.16 U3.17 U3.20 U3.21 U3.23 U3.24 U3.25 U3.28 U3.36 U3.37 U3.38 U3.39 U3.40 U3.41 U3.42 U3.43 U3.51 U3.52 U3.53 U6.5 U6.6 U6.8 U6.9 U6.10 U6.11 U6.12 U6.13 U7.3 U7.5 U7.11 U7.12 U7.14 U9.8 U9.9 U9.10 U9.11 U9.14 U10.3 U11.1 U11.8

## Polygon pours and split planes (outlines as drawn)
"GND A" on Top Layer "Top Layer-No Net" (solid, pour order 100): 2855.51,4093.7 2855.51,3944.88 3038.19,3762.2 3421.65,3762.2 3421.65,4093.7
"GND A" on Top Layer "Top Layer-No Net" (solid, pour order 84): 3275.71,2210.63 3842.52,2210.63 3842.52,3606.3 3279.53,3606.3
"GND A" on Top Layer "Top Layer-No Net" (solid, pour order 82): 3647.84,3987.01 2980.32,3987.01 2980.32,2862.2 3642.58,2199.94
GND on Top Layer "Top Layer-No Net" (solid, pour order 74): 2492.13,2165.35 3255.91,2165.35 3255.91,2940.94 3200.79,2996.06 2492.13,2996.06
GND on Top Layer "Top Layer-No Net" (solid, pour order 72): 3078.74,2984.25 2940.95,3122.05 2940.94,3122.05 2940.94,2984.25
GND on Top Layer "Top Layer-No Net" (solid, pour order 66): 2802.32,3922.09 2822.83,3942.6 2822.83,4094.49 2629.92,4094.49
GND on Top Layer "Top Layer-No Net" (solid, pour order 64): 2338.58,2326.77 2338.58,2318.9 2492.13,2165.35 2503.94,2177.17 2503.94,2326.77
GND on Top Layer "Top Layer-No Net" (solid, pour order 24): 972.44,4094.49 2673.23,4094.49 2960.63,3807.09 2960.63,2287.4 972.44,2287.4
M_GND on Top Layer "Top Layer-No Net" (solid, remove dead copper, pour order 22): 968.5,2102.36 2314.96,2102.36 2314.96,948.82 968.5,948.82
ANALOG on Top Layer "Top Layer-No Net" (solid, pour order 130): 3360.24,1506.3 3624.8,1506.3 3626.38,1504.72 3626.38,1121.26 3382.68,1121.26 3360.24,1143.7
ANALOG on Top Layer "Top Layer-No Net" (solid, pour order 132): 3986.05,1719.68 4303.87,1719.68 4303.87,1487.73 4288.58,1472.44 3984.65,1472.44
ANALOG on Top Layer "ANALOG_L01_P020" (solid, pour order 20): 2338.58,2086.61 2338.58,992.13 3416.93,992.13 3416.93,1459.31 3998.82,1459.31 3998.82,1720.7 3632.9,2086.61
GND on Bottom Layer "Top Layer-No Net" (solid, pour order 128): 2318.5,2335.43 2489.58,2163.99 2538.19,2212.6 2538.19,2335.43
GND on Bottom Layer "Top Layer-No Net" (solid, pour order 126): 3855.52,2248.03 3838.58,2248.03 3838.58,2156.3 3912.99,2156.3
GND on Bottom Layer "Top Layer-No Net" (solid, pour order 118): 3587.01,3612.6 4266.14,3612.6 4271.26,3607.48 4271.26,3235.83 3588.19,3235.83 3587.4,3236.61
GND on Bottom Layer "Top Layer-No Net" (solid, pour order 116): 3371.26,3957.87 3614.17,3957.87 3614.17,3415.35 3607.48,3408.66 3371.26,3408.66
GND on Bottom Layer "Top Layer-No Net" (solid, pour order 114): 4842.13,3248.43 4842.13,3102.36 3765.75,3102.36 3765.75,3248.43 3764.96,3249.21
GND on Bottom Layer "Top Layer-No Net" (solid, pour order 106): 3858.66,2164.96 2489.37,2164.96 2489.37,2326.77 2502.36,2339.76 3858.66,2339.76
GND on Bottom Layer "Top Layer-No Net" (solid, pour order 50): 3283.46,2405.51 3842.52,2405.51 3842.52,2224.41 3517.65,2224.41
M_GND on Bottom Layer "Bottom Layer-M_GND" (solid, pour order 133): 3437.73,992.13 3437.73,2106.3 954.47,2106.3 954.47,992.13
ANALOG on Bottom Layer "Bottom Layer-ANALOG" (solid, pour order 135): 4296.46,1736.22 4011.81,1736.22 3676.77,2092.13 3381.89,2092.13 3381.89,1112.99 3641.64,1112.99 3641.64,1472.44 4296.46,1472.44
GND on Bottom Layer "Top Layer-No Net" (solid, pour order 48): 976.38,4094.49 976.38,2322.83 979.92,2322.83 992.13,2322.83 3858.27,2322.83 3858.27,3102.36 4070.87,3102.36 4070.87,3437.01 3402.36,3437.01 3402.36,4094.49

## Keep-outs
Keep-Out Layer:
  lines w9.84: 950,975.2 950,4124.8 3430.32,4124.8 3430.32,4006.69 3430.81,4002.31 3432.27,3998.15 3434.61,3994.42 3437.73,3991.3 3441.46,3988.96 3445.62,3987.5 3450,3987.01 3646.85,3987.01 3646.85,3652.36 3647.34,3647.98 3648.8,3643.82 3651.15,3640.09 3654.26,3636.97 3658,3634.63 3662.16,3633.17 3666.54,3632.68 4296.46,3632.68 4296.46,3298.03 4296.95,3293.65 4298.41,3289.49 4300.75,3285.76 4303.87,3282.64 4307.6,3280.3 4311.76,3278.84 4316.14,3278.35 4887.01,3278.35 4887.01,1821.65 4316.14,1821.65 4311.76,1821.16 4307.6,1819.7 4303.87,1817.36 4300.75,1814.24 4298.41,1810.51 4296.95,1806.35 4296.46,1801.97 4296.46,1467.32 3666.52,1466.73 3662.14,1466.23 3657.98,1464.78 3654.25,1462.43 3651.14,1459.31 3648.8,1455.58 3647.34,1451.42 3646.85,1447.05 3646.85,1113.19 3451.75,1113.19 3445.62,1112.5 3441.46,1111.04 3437.73,1108.7 3434.61,1105.58 3432.27,1101.85 3430.81,1097.69 3430.32,1093.31 3430.32,975.2 950,975.2
  lines w10: 950.39,2090.16 950.39,2110.24 1224.41,2110.24 1224.41,2279.53 950.79,2279.53 950.79,2300.79 ; 4061.42,1740.55 4295.28,1740.55 ; 4081.99,1821.16 4083.56,1821.16 ; 4162.6,1740.55 4012.99,1740.55 3643.31,2110.24 2204.72,2110.24 2204.72,2279.53 2339.37,2279.53 2434.65,2184.25 3718.9,2184.25 3720.47,2184.25 4083.56,1821.16 ; 4311.76,1821.16 4083.56,1821.16

## Silkscreen, mask and mechanical layers (free items; w line width, h text height)
Top Overlay:
  lines w9.84: 1460.63,3070.87 1460.63,3031.5 1460.63,3023.62 1507.87,3023.62 ; 1519.69,2885.83 1519.69,2854.33 1551.18,2854.33 ; 4858.27,2043.31 4858.27,2094.49 ; 4858.27,2102.36 4846.46,2102.36 4870.08,2102.36 ; 4858.27,2094.49 4842.52,2078.74 4874.02,2078.74 4858.27,2094.49 ; 4858.27,2094.49 4858.27,2094.49 ; 3181.1,1700.29 3181.1,1980.32 3712.6,1980.32 3712.6,1700.29 3181.1,1700.29 ; 3324.21,2240.55 3734.06,2240.55 3734.06,3000.39 3324.21,3000.39 3324.21,2240.55
  text "INXTR" at 3740.16,3346.46 h20
  text "3V" at 1122.05,3196.85 h20
  text "GND A" at 3137.8,2996.06 h20
  text "SalidaDAC" at 2535,2970 h20
  text "GND" at 1956.69,2594.49 h20
  text "5V" at 1881.89,2566.93 h20
  text "PCB-MEI-300V-REV001" at 2440.94,2122.05 h51.18
  text "ANALOG" at 2374.02,1976.38 h20
  text "GND M" at 2236.22,1834.65 h20
  text "CF1" at 1094.49,1779.53 h20
  text "M 3V" at 2338.58,1716.11 h20
  text "ZX_ADE" at 2228.35,1307.09 h20
  text "REVP" at 1708.66,1228.35 h20
  text "ZX_1_ADE" at 1700.79,1125.98 h20
  text "CF2" at 1391.87,1111.02 h20
Bottom Overlay:
  lines w9.84: 4846.46,2043.31 4870.08,2043.31 4858.27,2043.31 ; 4858.27,2102.36 4858.27,2051.18 ; 4858.27,2051.18 4842.52,2066.93 4874.02,2066.93 4858.27,2051.18 ; 4858.27,2051.18 4858.27,2051.18
  text "IAN" at 3045.14,1823.62 h20
  text "VP_ADE" at 3015.75,1625.98 h20
  text "IAP" at 3188.98,1346.46 h20
  text "VN_ADE" at 2787.4,1181.1 h20

## Text inside footprints (layer, text, board x,y; h text height)
P6: Top Overlay "13" at 1212.6,3122.05 h35.43 r90; Top Overlay "14" at 1066.93,3125.98 h35.43 r90; Top Overlay "1" at 1205.43,2337.48 h35.43 r90; Top Overlay "2" at 1105.43,2337.48 h35.43 r90
U5: Mechanical 13 "*" at 1670.84,2418.34 h35.43 r270; Mechanical 13 "*" at 1670.84,2418.34 h35.43 r270